# Altium PCB water-sensor-pcb.PcbDoc
Units mm, origin at the board's own origin, x right, y up, seen from the top; angles counter-clockwise.
Board outline 151 x 34 mm, 2 copper layers (Top Layer, Bottom Layer); 9 components, 5 nets, 41 pads, 0 vias.
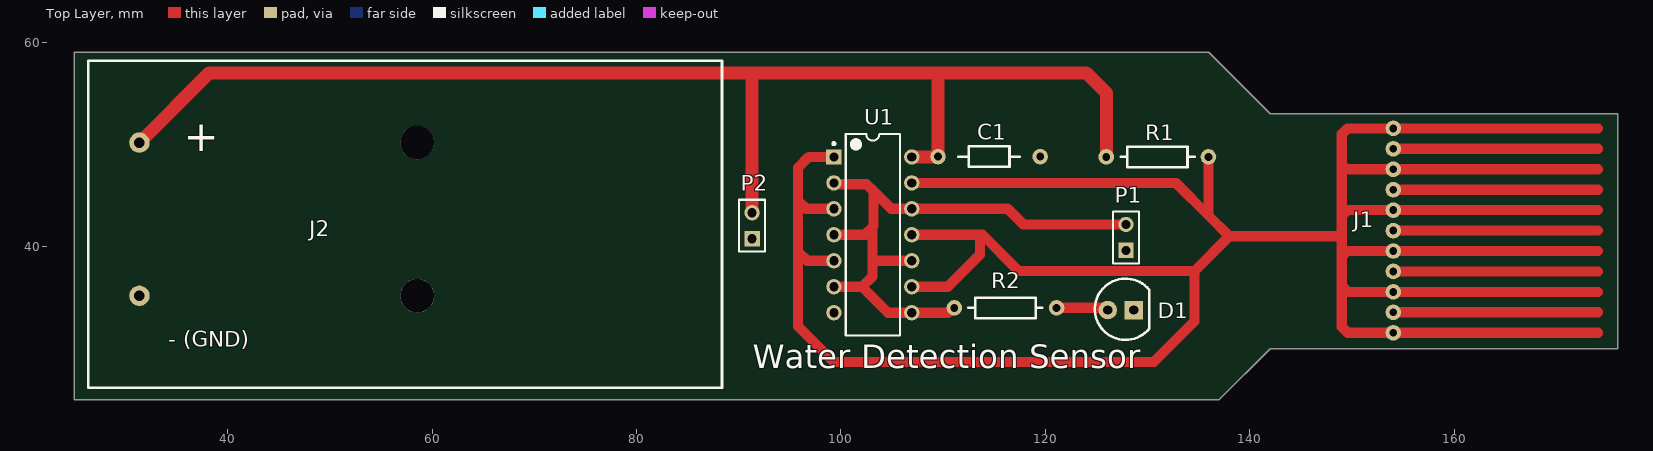
[diagram p0: Top Layer view]
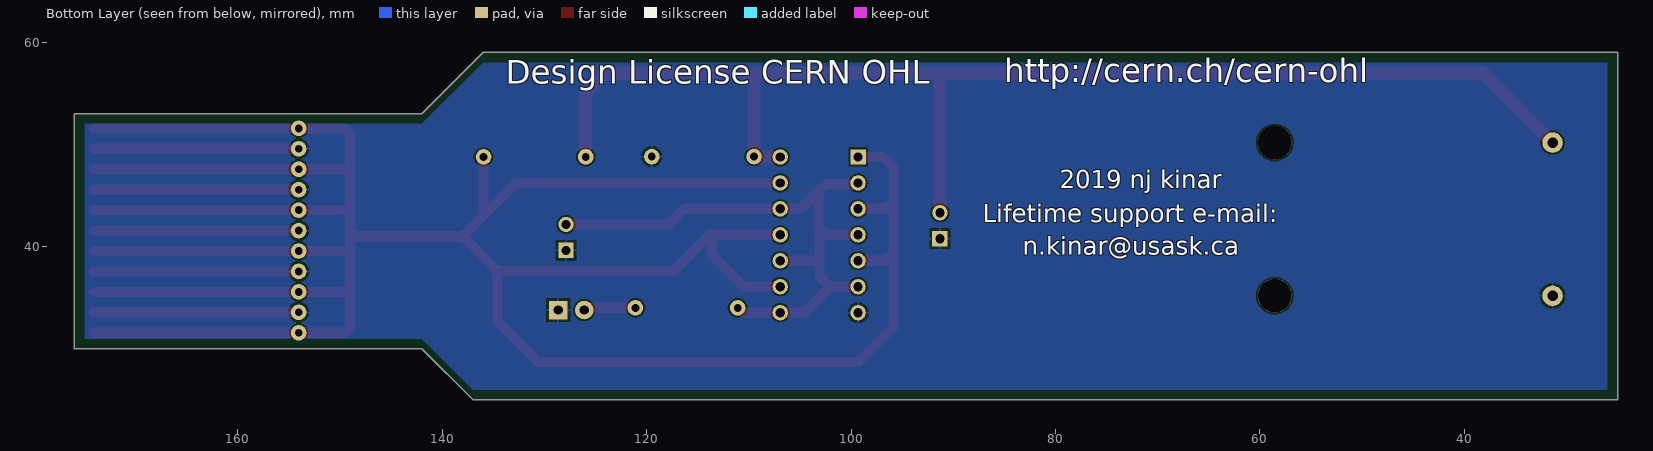
[diagram p1: Bottom Layer view, seen from below]

## Layer stack, top to bottom
Top Solder: solder mask 0.0102, Solder Resist, Dk 3.5
Top Layer: signal copper 0.0356
Dielectric 1: dielectric 0.32, FR-4, Dk 4.8
Bottom Layer: signal copper 0.0356
Bottom Solder: solder mask 0.0102, Solder Resist, Dk 3.5

## Board outline
25,59 26,59 136,59 142,53 176,53 176,30 142,30 137,25 25,25 25,59 26,59

## Design rules (kind name [scope] priority, off if disabled: settings)
Clearance "Clearance~Sunstone Circuits" [All] p1: gap=0.178 ignorepadtopadclearanceinfootprint=FALSE except(0: Arc-Hole Track-Hole SMDPad-Hole THPad-Hole Via-Hole Fill-Hole Poly-Hole Region-Hole Text-Hole) // Sunstone Circuits Minimum Clearance Rule (Double Sided)
HoleSize "HoleSize~Sunstone Circuits" [All] p1: absolutevalues=TRUE maxlimit=6.375 minlimit=0.508 maxpercent=80.000 minpercent=20.000 // SSC Hole Size Rule For Single Sided & Double Sided Designs.
HoleSize Testpoint [All] p2: absolutevalues=TRUE maxlimit=2.54 minlimit=0.025 maxpercent=80.000 minpercent=20.000
HoleSize TestPointUsage [All] p3: absolutevalues=TRUE maxlimit=2.54 minlimit=0.025 maxpercent=80.000 minpercent=20.000
MinimumAnnularRing "MinimumAnnularRing~Sunstone Circuits" [All] p1: minimumring=0.178 // Sunstone Circuits Minimum Annular Ring (Double Sided)
PlaneClearance "PlaneClearance~Sunstone Circuits" [All] p1: clearance=0.305 // Sunstone Circuits Power Plane Clearance Rule (Double Sided)
PlaneConnect "PlaneConnect~Sunstone Circuits" [All] p1: planeconnectstyle=Relief reliefexpansion=0.254 reliefentries=4 reliefconductorwidth=0.203 reliefairgap=0.254 // Sunstone Circuits Power Plane Connect Rule (Double Sided)
PolygonConnect "PolygonConnect~Sunstone Circuits" [All] p1: connectstyle=Relief reliefconductorwidth=0.203 reliefentries=4 polygonreliefangle="90 Angle" airgapwidth=0.254 // Sunstone Circuits Polygon Connect Style (Double Sided)
RoutingVias "RoutingVias~Sunstone Circuits" [All] p1: holewidth=0.508 width=1.016 viastyle="Through Hole" minholewidth=0.508 minwidth=1.016 maxholewidth=1.016 maxwidth=2.032 // Sunstone Circuits Routing Vias Rule (Double Sided)
ShortCircuit "ShortCircuit~Sunstone Circuits" [All] p1: allowed=FALSE // Sunstone Circuits Short Circuit Rule~Do Not Allow (Double Sided)
SilkToSolderMaskClearance [IsPad] p1 off: minsilkscreentomaskgap=0.254 clearancetoexposedcopper=TRUE
SolderMaskExpansion "SolderMaskExpansion~Sunstone Circuits" [All] p1: expansion=0.076 istentingtop=FALSE // Sunstone Circuits Solder Mask Expansion Rule (Double Sided)
ViasUnderSMD "ViasUnderSMD~Sunstone Circuits" [All] p1: allowed=FALSE // Sunstone Circuits Vias Under SMD~Do Not Allow (Double Sided)
Width "Width~Sunstone Circuits" [All] p1: maxlimit=2.54 minlimit=0.178 preferedwidth=0.254 // Sunstone Circuits Minimum Width Rule (Double Sided)
25 further rules are at their usual default settings.

## Components (designator, comment, footprint, x,y, rotation, side; value= is the part's Value field where it differs from the comment)
C1 "Cap Semi" A104K15X7RF5TAA 119.5,48.8 r180 top value=0.1uF
D1 "LED" WP7113LGD 126.111,33.782 r0 top
J1 "water-sensor" water-sensor 154.051,51.561 r0 top
J2 "BATTERY HOLDER AA 2 CELL PC PIN" 2462 31.367,50.169 r0 top
P1 "Header 2" HDR1X2 127.889,39.624 r90 top
P2 "Header 2" HDR1X2 91.313,40.767 r90 top
R1 "Res3" CFR-25JB-52-1M 131.064,48.768 r180 top value=1M
R2 "Res3" CF14JT150R 116,34 r0 top value=150
U1 "SN74HC14N" N0014A 103.124,41.148 r0 top

## Footprints (in the part's own frame and the unit in brackets; to place one, negate y for a bottom-side part, rotate by r counter-clockwise, add the part's x,y. Pads: shape width x height; smd on the part's side, far side on the other; paste and mask are expansions set on the pad)
2462 [mm] "BATTERY HOLDER AA 2 CELL PC PIN"
  round 2 hole 1.02: 1(0,0) 2(0,-14.99)
  round 3.3 hole 3.3: H1(27.18,0) H2(27.18,-14.99)
  silkscreen extent -5,-24 57,8
A104K15X7RF5TAA [mil] "CAP CER 0.1UF 50V X7R AXIAL"
  round 60 hole 30: 1(0,0) 2(393.7,0)
  silkscreen extent 79,-39 315,39
CF14JT150R [mil] "RES 150 OHM 1/4W 5% AXIAL"
  round 60 hole 30: 1(-192.91,0) 2(200.79,0)
  silkscreen extent -140,-39 146,39
CFR-25JB-52-1M [mil] "RES 1M OHM 1/4W 1% AXIAL"
  round 60 hole 30: 1(-192.91,0) 2(200.79,0)
  silkscreen extent -140,-39 146,39
HDR1X2 [mm] "Connector; Header; 2 Position"
  rect 1.5x1.5 hole 0.9: 1(0,0)
  round 1.5 hole 0.9: 2(2.54,0)
  silkscreen extent -1.27,-1.27 3.81,1.27
N0014A [mm] "DIP, 14-Leads, Body 19.7x6.6mm, Pitch 2.54mm"
  rect 1.5x1.5 hole 0.9: 1(-3.81,7.62)
  round 1.5 hole 0.9: 2(-3.81,5.08) 3(-3.81,2.54) 4(-3.81,0) 5(-3.81,-2.54) 6(-3.81,-5.08) 7(-3.81,-7.62) 8(3.81,-7.62) 9(3.81,-5.08) 10(3.81,-2.54) 11(3.81,0) 12(3.81,2.54) 13(3.81,5.08) 14(3.81,7.62)
  silkscreen extent -3.93,-9.85 2.65,9.85, body extent -3.95,-9.85 3.95,9.85, height 5.08
water-sensor [mil]
  round 60 hole 30 mask+3: 1(0,0) 2(0,-78.74) 3(0,-157.48) 4(0,-236.22) 5(0,-314.96) 6(0,-393.7) 7(0,-472.44) 8(0,-551.18) 9(0,-629.92) 10(0,-708.66) 11(0,-787.4)
  Top Layer lines w39.37: 0,-787.4 787.4,-787.4 ; 0,-708.66 787.4,-708.66 ; 0,-629.92 787.4,-629.92 ; 0,-551.18 787.4,-551.18 ; 0,-472.44 787.4,-472.44 ; 0,-393.7 787.4,-393.7 ; 0,-314.96 787.4,-314.96 ; 0,-236.22 787.4,-236.22 ; 0,-157.48 787.4,-157.48 ; 0,-78.74 787.4,-78.74 ; 0,0 787.4,0
WP7113LGD [mm] "WP7113LGD"
  round 1.8 hole 0.9: 1(0,0)
  rect 1.8x1.8 hole 0.9: 2(2.54,0)
  silkscreen extent -1.26,-2.92 4.06,3.08

## Part data
C1: "Capacitor (Semiconductor SIM Model)", Capacitance=100nF, Case/Package=Dipped, Dielectric=X7R, Manufacturer="Vishay BCcomponents", Manufacturer Part Number=A104K15X7RF5TAA, Max Operating Temperature=125°C, Min Operating Temperature=-55°C, Package Quantity=1, Supplier Part Number 1=1109PHCT-ND, Tolerance=10%, Voltage=50V, ComponentLink1Description=https://datasheet.ciiva.com/145/aseries-145936.pdf?src-supplier=Digi-Key, ComponentLink1URL=https://datasheet.ciiva.com/145/aseries-145936.pdf?src-supplier=Digi-Key, ComponentLink2Description=https://datasheet.ciiva.com/5815/1734588-5815375.pdf?src-supplier=Farnell, ComponentLink2URL=https://datasheet.ciiva.com/5815/1734588-5815375.pdf?src-supplier=Farnell, ComponentLink3Description=https://datasheet.ciiva.com/18442/70122957-18442089.pdf?src-supplier=Allied+Electronics, ComponentLink3URL=https://datasheet.ciiva.com/18442/70122957-18442089.pdf?src-supplier=Allied+Electronics, ComponentLink4Description=https://datasheet.ciiva.com/2988/aseries-2988250.pdf?src-supplier=Avnet, ComponentLink4URL=https://datasheet.ciiva.com/2988/aseries-2988250.pdf?src-supplier=Avnet, ComponentLink5Description=https://datasheet.ciiva.com/17444/aseries-17444908.pdf?src-supplier=Avnet+Europe, ComponentLink5URL=https://datasheet.ciiva.com/17444/aseries-17444908.pdf?src-supplier=Avnet+Europe, ComponentLink6Description=https://datasheet.ciiva.com/46418/1796772-46418252.pdf?src-supplier=Element14, ComponentLink6URL=https://datasheet.ciiva.com/46418/1796772-46418252.pdf?src-supplier=Element14, ComponentLink7Description=https://datasheet.ciiva.com/145/aseries-145935.pdf?src-supplier=Digi-Key, ComponentLink7URL=https://datasheet.ciiva.com/145/aseries-145935.pdf?src-supplier=Digi-Key, Contact Plating=Tin, Diameter=2.5mm, LatestRevisionDate=29-May-2009, LatestRevisionNote="IPC-7351 Footprint Added.", Lead Diameter=0.5mm, Lead Free="Lead Free", Lead Length=24.3mm, Length=3.8mm, Mount="Through Hole,PCB,Axial", PackageDescription="Chip Capacitor", PackageReference=C1206, Packaging="Tape and Reel", Pricing 1="1=0.24000, 10=0.16500, 100=0.09350, 500=0.06598, 1000=0.05773, 2500=0.05498 (USD)", Published=8-Jun-2000, Publisher="Altium Limited", Radiation Hardening=No, REACH SVHC=Unknown, RoHS=Yes, Stock 1=502711, Supplier 1=Digi-Key, Termination=Axial, Voltage Rating=50V, Voltage Rating (DC)=50V
D1: Case/Package=Radial, Color=Green, Forward Current=25mA, Forward Voltage=1.9V, Manufacturer=Kingbright, Manufacturer Part Number=WP7113LGD, Max Operating Temperature=85°C, Min Operating Temperature=-40°C, Package Quantity=1000, Supplier Part Number 1=754-1265-ND, Test Current=2mA, ComponentLink1Description=https://datasheet.ciiva.com/16510/wp7113lgd-16510240.pdf?src-supplier=Future+Electronics, ComponentLink1URL=https://datasheet.ciiva.com/16510/wp7113lgd-16510240.pdf?src-supplier=Future+Electronics, ComponentLink2Description=https://datasheet.ciiva.com/4692/wp7113lgd-83708-4692822.pdf?src-supplier=Mouser, ComponentLink2URL=https://datasheet.ciiva.com/4692/wp7113lgd-83708-4692822.pdf?src-supplier=Mouser, ComponentLink3Description=https://datasheet.ciiva.com/2114/wp7113lgd-2114397.pdf?src-supplier=Digi-Key, ComponentLink3URL=https://datasheet.ciiva.com/2114/wp7113lgd-2114397.pdf?src-supplier=Digi-Key, ComponentLink4Description=https://datasheet.ciiva.com/14604/70062982-14604412.pdf?src-supplier=Allied+Electronics, ComponentLink4URL=https://datasheet.ciiva.com/14604/70062982-14604412.pdf?src-supplier=Allied+Electronics, Dominant Wavelength=568nm, Height=8.6mm, Illumination Color=Green, Lead Free="Lead Free", Lens Color=Green, Lens Style=Round,Diffused,Tinted, Luminous Intensity=2mcd, Mount="Through Hole", Packaging=Bulk, Pricing 1="1=0.48000, 10=0.34200, 100=0.15200, 500=0.10640, 1000=0.08740, 2500=0.07600, 5000=0.06840, 10000=0.06080, 25000=0.05700 (USD)", RoHS=Yes, Stock 1=86243, Supplier 1=Digi-Key, Viewing Angle=30°
J1: library part Water-sensor, "Water sensor footprint"
J2: library part 2462, "Battery Holder (Open) AA 2 Cell PC Pin", Manufacturer="Keystone Electronics", Package Quantity=1, Supplier Part Number 1=36-2462-ND, Body Material=Polypropylene, ComponentLink1Description=https://datasheet.ciiva.com/3/2462-3986.pdf?src-supplier=Digi-Key, ComponentLink1URL=https://datasheet.ciiva.com/3/2462-3986.pdf?src-supplier=Digi-Key, ComponentLink2Description=https://datasheet.ciiva.com/20221/18-3683-20221703.pdf?src-supplier=Rapid+Electronics, ComponentLink2URL=https://datasheet.ciiva.com/20221/18-3683-20221703.pdf?src-supplier=Rapid+Electronics, ComponentLink3Description=https://datasheet.ciiva.com/1391/1714047-1391544.pdf?src-supplier=Element14, ComponentLink3URL=https://datasheet.ciiva.com/1391/1714047-1391544.pdf?src-supplier=Element14, ComponentLink4Description=https://datasheet.ciiva.com/14603/70182746-14603557.pdf?src-supplier=Allied+Electronics, ComponentLink4URL=https://datasheet.ciiva.com/14603/70182746-14603557.pdf?src-supplier=Allied+Electronics, ComponentLink5Description=https://datasheet.ciiva.com/16364/m60-2p26-16364492.pdf?src-supplier=Future+Electronics, ComponentLink5URL=https://datasheet.ciiva.com/16364/m60-2p26-16364492.pdf?src-supplier=Future+Electronics, Contact Material=Brass, Contact Plating=Nickel, Lead Free="Lead Free", Manufacturer Part Number=2462, Material=Steel,Plastic, Mount="Through Hole,PCB", Number of Batteries=2, Number of Cells=2, Packaging=Bag, Pricing 1="1=1.21000, 10=0.97300, 50=0.85540, 100=0.85180, 250=0.74188, 500=0.69644, 1000=0.65102, 2500=0.59046, 5000=0.54504 (USD)", REACH SVHC="No SVHC", RoHS=Yes, Stock 1=19923, Supplier 1=Digi-Key, Termination="PC Pin", Wire/Cable Gauge=26AWG
P1 P2: "Header, 2-Pin", LatestRevisionDate=17-Jul-2002, LatestRevisionNote="Re-released for DXP Platform.", Publisher="Altium Limited"
R1: "Resistor", Case/Package=Axial, Manufacturer=Yageo, Manufacturer Part Number=CFR-25JB-52-1M, Max Operating Temperature=155°C, Max Power Dissipation=250mW, Min Operating Temperature=-55°C, Package Quantity=200, Resistance=1MR, Supplier Part Number 1=1.0MQBK-ND, Temperature Coefficient=-1500ppm/°C, Tolerance=5%, ComponentLink1Description=http://www.yageo.com/NewPortal/yageodocoutput?fileName=/pdf/throughhole/Yageo_LR_CFR_2013.pdf&src-supplier=Digi-Key, ComponentLink1URL=http://www.yageo.com/NewPortal/yageodocoutput?fileName=/pdf/throughhole/Yageo_LR_CFR_2013.pdf&src-supplier=Digi-Key, ComponentLink2Description=http://www.yageo.com/documents/recent/General%20Type_CFR.pdf?src-supplier=Future+Electronics, ComponentLink2URL=http://www.yageo.com/documents/recent/General%20Type_CFR.pdf?src-supplier=Future+Electronics, Composition="Carbon Film", LatestRevisionDate=29-May-2009, LatestRevisionNote="IPC-7351 Footprint Added.", Lead Free="Lead Free", Length=0.248inch, Number of Terminations=2, PackageDescription="Chip Resistor", PackageReference=J1-0603, Packaging=Bulk, Power Rating=250mW, Pricing 1="1=0.10000, 10=0.06700, 25=0.04640, 50=0.03600, 100=0.02580, 250=0.02008, 500=0.01596, 1000=0.01133, 5000=0.00876 (USD)", Published=8-Jun-2000, Publisher="Altium Limited", RoHS=Yes, Stock 1=170936, Supplier 1=Digi-Key
R2: "Resistor", Case/Package=Conformal, Manufacturer="Stackpole Electronics", Manufacturer Part Number=CF14JT150R, Max Operating Temperature=155°C, Max Power Dissipation=250mW, Min Operating Temperature=-55°C, Package Quantity=5000, Resistance=150R, Supplier Part Number 1=CF14JT150RCT-ND, Temperature Coefficient=-400ppm/°C, Tolerance=5%, ComponentLink1Description=http://www1.futureelectronics.com/doc/STACKPOLE%20ELECTRONICS/CF-1__4-150R-5%25-R.pdf?src-supplier=Future+Electronics, ComponentLink1URL=http://www1.futureelectronics.com/doc/STACKPOLE%20ELECTRONICS/CF-1__4-150R-5%25-R.pdf?src-supplier=Future+Electronics, ComponentLink2Description=https://www.seielect.com/Catalog/SEI-CF_CFM.pdf?src-supplier=Digi-Key, ComponentLink2URL=https://www.seielect.com/Catalog/SEI-CF_CFM.pdf?src-supplier=Digi-Key, ComponentLink3Description=https://www.seielect.com/catalog/SEI-Packaging.pdf?src-supplier=Digi-Key, ComponentLink3URL=https://www.seielect.com/catalog/SEI-Packaging.pdf?src-supplier=Digi-Key, ComponentLink4Description=https://www.verical.com/server-webapp/html/getDatasheet?partID=360907&src-supplier=Verical, ComponentLink4URL=https://www.verical.com/server-webapp/html/getDatasheet?partID=360907&src-supplier=Verical, ComponentLink5Description=http://components.arrow.com/part/dataview/44988609S3426981N1174?src-supplier=Arrow, ComponentLink5URL=http://components.arrow.com/part/dataview/44988609S3426981N1174?src-supplier=Arrow, ComponentLink6Description=https://www.seielect.com/catalog/SEI-CF_CFM.pdf?src-supplier=Avnet, ComponentLink6URL=https://www.seielect.com/catalog/SEI-CF_CFM.pdf?src-supplier=Avnet, ComponentLink7Description=https://www.seielect.com/catalog/SEI-CF_CFM.pdf?src-supplier=Avnet+Asia, ComponentLink7URL=https://www.seielect.com/catalog/SEI-CF_CFM.pdf?src-supplier=Avnet+Asia, Composition="Carbon Film", Contact Plating=Tin,Matte, Diameter=2.3mm, Features="Flame Retardant Coating", LatestRevisionDate=29-May-2009, LatestRevisionNote="IPC-7351 Footprint Added.", Lead Free="Lead Free", Length=6.5mm, Military Standard=Not, Mount="Through Hole,Axial", Number of Terminations=2, PackageDescription="Chip Resistor", PackageReference=J1-0603, Packaging="Tape and Reel", Power Rating=250mW, Pricing 1="1=0.10000, 10=0.04000, 25=0.02880, 50=0.02200, 100=0.01620, 250=0.01236, 500=0.00990, 1000=0.00729 (USD)", Published=8-Jun-2000, Publisher="Altium Limited", Radiation Hardening=No, RoHS=Yes, Stock 1=54942, Supplier 1=Digi-Key, Termination=Axial
U1: library part CMP-1615-00889-3, "Hex Schmitt-Trigger Inverters, N0014A, TUBE", Case/Package=PDIP, F @ Nom Voltage(Max)(Mhz)=20, Generic Part Number=SN74HC14, High Level Output Current=-5.2mA, ICC @ Nom Voltage(Max)(mA)=0.02, Low Level Output Current=5.2mA, Manufacturer="Texas Instruments", Max Operating Temperature=85°C, Max Supply Voltage=6V, Min Operating Temperature=-40°C, Min Supply Voltage=2V, Operating Supply Voltage=5V, Operating Temperature Range(C)="-40 to 85", Package Quantity=25, Quiescent Current=2uA, Rating=Catalog, Supplier Part Number 1=296-1577-5-ND, tpd @ Nom Voltage(Max)(ns)=31, Voltage(Nom)(V)=5, Bits(#)=6, Code_JEDEC=MS-001, ComponentLink1Description=https://datasheet.ciiva.com/7783/1695231-7783059.pdf?src-supplier=Element14, ComponentLink1URL=https://datasheet.ciiva.com/7783/1695231-7783059.pdf?src-supplier=Element14, ComponentLink2Description=https://datasheet.ciiva.com/15089/getdatasheetpartid-140574-15089283.pdf?src-supplier=Verical, ComponentLink2URL=https://datasheet.ciiva.com/15089/getdatasheetpartid-140574-15089283.pdf?src-supplier=Verical, ComponentLink3Description=https://datasheet.ciiva.com/29296/164232-da-01-en-74hc14-29296624.pdf?src-supplier=Conrad, ComponentLink3URL=https://datasheet.ciiva.com/29296/164232-da-01-en-74hc14-29296624.pdf?src-supplier=Conrad, ComponentLink4Description=https://datasheet.ciiva.com/1865/sn74hc14-1865973.pdf?src-supplier=Digi-Key, ComponentLink4URL=https://datasheet.ciiva.com/1865/sn74hc14-1865973.pdf?src-supplier=Digi-Key, ComponentLink5Description=https://datasheet.ciiva.com/7367/1764130-7367534.pdf?src-supplier=Newark, ComponentLink5URL=https://datasheet.ciiva.com/7367/1764130-7367534.pdf?src-supplier=Newark, ComponentLink6Description=https://datasheet.ciiva.com/41456/001016663-da-01-en-ic-hex-schm-tri-in-sn74hc14n-pdip-14-tid-41456956.pdf?src-supplier=Conrad, ComponentLink6URL=https://datasheet.ciiva.com/41456/001016663-da-01-en-ic-hex-schm-tri-in-sn74hc14n-pdip-14-tid-41456956.pdf?src-supplier=Conrad, Contact Plating=Gold, DatasheetVersion=SCLS085G, Height=4.57mm, Input Type=CMOS, Lead Free="Lead Free", Length=19.3mm, Logic Function="Schmitt Trigger,Buffer,Inverter", Manufacturer Part Number=SN74HC14N, Max Output Current=5.2mA, Mount="Through Hole", Number of Bits=6, Number of Circuits=6, Number of Elements=6, Number of Gates=6, Number of Inputs=1, Number of Output Lines=6, Number of Pins=14, Output Current=5.2mA, Output Drive (IOL/IOH)(Max)(mA)=-4/4, Output Type=CMOS, PackageReference=N0014A, Packaging=Rail/Tube, Pricing 1="1=0.55000, 10=0.46900, 25=0.43760, 100=0.35000, 500=0.27500, 1000=0.21250, 2500=0.19375, 5000=0.18125 (USD)", Propagation Delay=21ns, Radiation Hardening=No, REACH SVHC="No SVHC", RoHS=Yes, Schmitt Trigger=Yes, Schmitt Trigger Input=Yes, Stock 1=12331, Supplier 1=Digi-Key, Technology Family=HC, Turn-On Delay Time=155ns, VCC(Max)(V)=6, VCC(Min)(V)=2, Weight=0.032734oz, Width=6.35mm

## Nets (pads, with @x,y where several pads share a name; then routed paths per layer and width w, separated by ;. In a path a pad name is that pad's centre, name@x,y a point inside that pad or via, vN(x,y) a via of type N, cw(c..) or ccw(c..) an arc to the next point about the centre after c; other vN are vias at no path point)
3V: C1.2 J2.1 P2.2 R1.2 U1.14 | length 129.2
  Top Layer w1.27: J2.1 38.198,57 91,57 ; P2.2 91.313,56.687 91,57 ; U1.14@106.978,48.812 U1.14 109.468,48.768 C1.2 109.5,57 ; R1.2 126,48.804 126,55 124,57 109.5,57 ; 91,57 109.5,57
GND: C1.1 D1.2 J1.2 J1.4 J1.6 J1.8 J1.10 J2.2 P1.1 P2.1 U1.7
NetD1_1: D1.1 R2.2 | length 5.1
  Top Layer w1: R2.2 125.677,34 125.895,33.782 D1.1
NetJ1_1: J1.1 J1.3 J1.5 J1.7 J1.9 J1.11 R1.1 U1.1 U1.3 U1.5 U1.9 U1.11 U1.13 | length 218.5
  Top Layer w1: U1.5 96.692,38.608 95.8,39.5 ; U1.3 96.612,43.688 95.8,44.5 ; U1.1 96.868,48.768 95.8,47.7 95.8,44.5 ; U1.9 110.468,36.068 113.6,39.2 113.6,40.896 113.852,41.148 ; U1.13 132.772,46.228 135.964,43.036 ; U1.11@106.982,41.1 U1.11 113.852,41.148 ; R1.1 135.964,43.036 ; J1.11 149.586,31.561 149,32.147 149,36.147 ; J1.9 149.586,35.561 149,36.147 ; J1.7 149.561,39.561 149,39 ; J1.5 149.561,43.561 149,43 ; J1.3 149.439,47.561 149,48 ; J1.1 149.586,51.561 149,50.975 149,48 ; 95.8,39.5 95.8,32.2 99.3,28.7 130.6,28.7 134.6,32.7 134.6,37.6 ; 95.8,39.5 95.8,44.5 ; 113.852,41.148 117.4,37.6 134.6,37.6 ; 134.6,37.6 138,41 ; 135.964,43.036 138,41 ; 138,41 149,41 ; 149,36.147 149,39 ; 149,39 149,41 ; 149,41 149,43 ; 149,43 149,48
NetP1_2: P1.2 R2.1 U1.2 U1.4 U1.6 U1.8 U1.10 U1.12 | length 61
  Top Layer w1: U1.6 102.068,36.068 ; U1.4 102.348,41.148 103.1,41.9 ; U1.2 99.41,46.132 99.763,46.132 99.796,46.1 102.5,46.1 103.25,45.35 ; U1.10 103.108,38.608 103.1,38.6 ; R2.1 110.958,34 110.486,33.528 U1.8 104.608,33.528 102.068,36.068 ; P1.2 117.836,42.164 116.312,43.688 U1.12 104.912,43.688 103.25,45.35 ; 102.068,36.068 103.1,37.1 103.1,38.6 ; 103.1,38.6 103.1,41.9 ; 103.1,41.9 103.2,42 103.2,45.3 103.25,45.35
pads on no net: J2.H1 J2.H2

## Polygon pours and split planes (outlines as drawn)
GND on Bottom Layer "GND" (solid, pour order 0): 26,58 136,58 142,52 175,52 175,31 142,31 137,26 26,26

## Silkscreen, mask and mechanical layers (free items; w line width, h text height)
Top Overlay:
  text "+" at 35.7,49.3 h3
  text "- (GND)" at 34.2,30.2 h1.52
  text "Water Detection Sensor" at 91.4,27.3 h4
Bottom Overlay:
  text "http://cern.ch/cern-ohl" at 85,55.311 h4
  text "Design License CERN OHL" at 133.8,55.152 h4
  text "2019 nj kinar" at 79.6,45.1 h3
  text "Lifetime support e-mail:" at 87.1,41.8 h3
  text "n.kinar@usask.ca" at 83.2,38.6 h3
Mechanical 1:
  lines w0.254: 25,25 25,59 136,59 142,53 176,53 176,30 142,30 137,25 25,25